# Altium PCB Mainboard.PcbDoc (part 2 of 2)
Units mm, origin at the board's own origin, x right, y up, seen from the top; angles counter-clockwise.
Board outline 100 x 100 mm, 10 copper layers (L1 SIG, L2 GND, L3 SIG HS, L4 SIG HS, L5 VDD, L6 GND, L7 SIG HS, L8 SIG HS, L9 VCC, L10 SIG), stack 1.573 mm thick; 241 components, 320 nets, 1344 pads, 20 vias.
Unrouted connection lines stored in the file: 832.
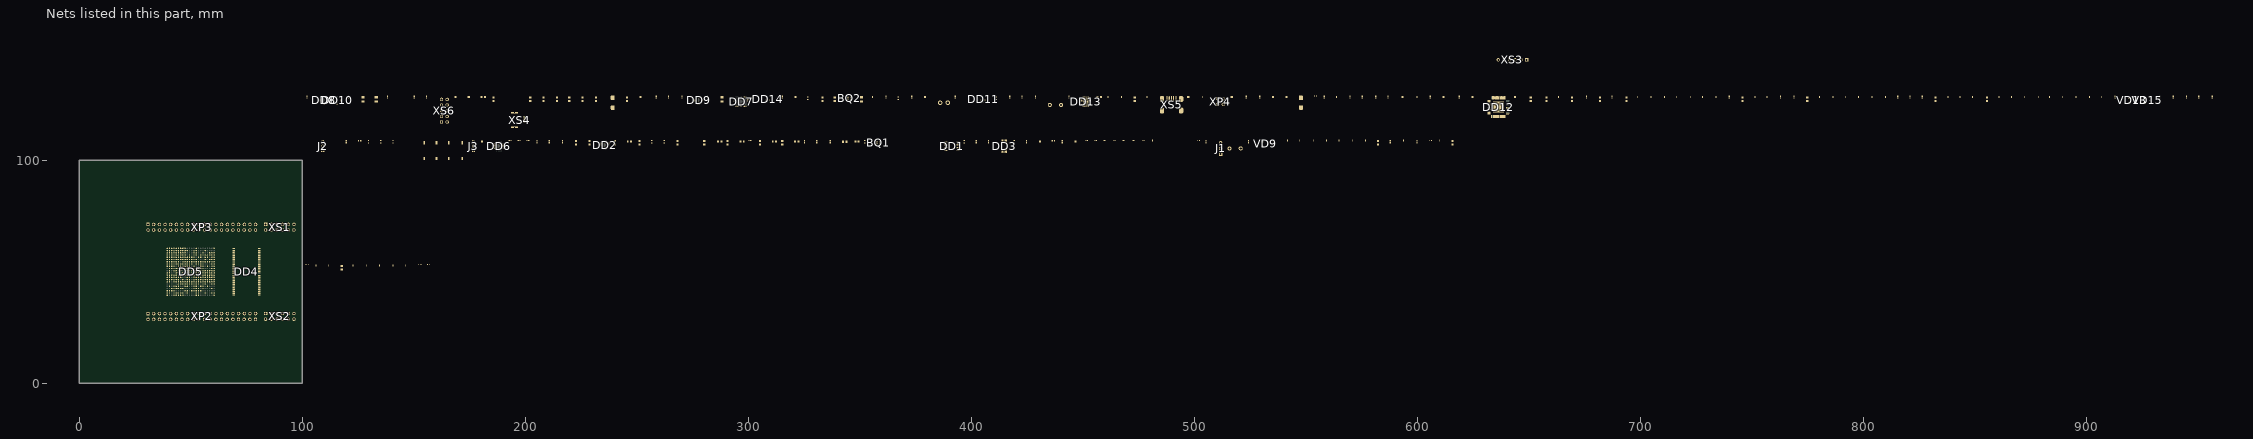
[diagram p2: the nets of this part, all layers, seen from the top]

## Part data
BQ1: "Clock 50 MHZ  main clock for FPGA  3.2x2.5 mm 3.3V 6.5mA", Manufacturer="Silicon Labs", Name=501HAA50M0000CAFR
BQ2: "Clock 24 MHz  secondary clock   3.2x2.5 mm", Manufacturer="Silicon Labs", Name=501HAA24M0000CAFR
C1 C3 C4 C6 C7 C8 C9 C18 C19 C20 C21 C22 C24 C25 C26 C27 C28 C29 C30 C31 C32 C34 C35 C36 C37 C42 C45 C46 C48 C49 C50 C51 C52 C53 C54 C55 C56 C57 C58 C59 C60 C61 C62 C63 C64 C70 C71 C72 C73 C74 C75 C81 C82 C84 C85 C87 C92 C93 C95 C96: library part Cap_0201, "Non-polar Capacitor"
C2 C5 C10 C11 C12 C13 C14 C15 C16 C17 C76 C77 C90: library part Cap_0402, "Non-polar Capacitor"
C23 C33 C38 C39 C41 C43 C44 C47 C66 C67 C78 C79 C80 C83 C86 C88 C89 C91 C94: library part Cap_0603, "Non-polar Capacitor"
C40 C65 C68 C69: library part Cap_0805, "Non-polar Capacitor"
DD1: "16Mb serial flash off-chip processor code storage, etc", Manufacturer=Micron, Name=M25P16-VMN6
DD2: "Accelerometer ADXL362  2.5 or 3.3V 3uA", Manufacturer=ADI, Name="ADXL362BCCZ-RL7 SMD 16 pins"
DD3: "12-bit DAC AD5681R", Manufacturer=ADI, Name=AD5681RBRMZ-RL7
DD4: "SDRAM 8 MB 3.3V 90mA", Manufacturer=ISSI, Name="IS42S16400J-7TL  TSOPII 4 pins"
DD5: "MAX10 10M08DAF484", Manufacturer=ALTERA, Name=10M08DAF484C8GES
DD6: "ADT7420 16-lead LFCSP_WQ", Manufacturer=ADI, Name=ADT7420UCPZ-RL7
DD7: "EN5329QI 24-pin (4 x 6 x 1.1mm) QFN T&R; 3.3", Manufacturer=ALTERA, Name=EN5329QI
DD8 DD9 DD10: "EP53A8LQI 16-pin QFN T&R;  2.5, 1.8, 1.2", Manufacturer=ALTERA, Name=EP53A8LQI
DD11 DD14: "TPD6E001RSER, ESD QFN10-RSE", Manufacturer="Texas Instruments", Name=TPD6E001RSER
DD12: "required for USB Blaster  SQFP7x7-64-EXP", Manufacturer=ALTERA, Name=5M80ZE64C5N
DD13: "FT240XQ FTDI for USB Bluster", Manufacturer=FTDI, Name=FT240XQ-T
J1: "Jumper 2.54mm pitch (default short PIN 1 and 2) 1x3_2.54mm boot select"
J2: "Jumper 2.00mm pitch (default short PIN 1 and 2) 3.3V or 2.5V VCCIO selection 1x3_2.0mm"
J3: "Jumper 2.00mm pitch (default short PIN 1 and 2) 3.3V or 2.5V VCCIO selection  1x3_2.0mm"
L1 L2 L3 L4 L5 L6: library part Inductor, "Inductor  4.7uH/600mA", Manufacturer=Murata, Name=LQM18PN4R7MFR
R1 R2 R3 R4 R13 R14 R15 R16 R17 R18 R19 R20 R21 R22 R23 R24 R25 R26 R28 R29 R30 R31 R32 R33 R34 R35 R36 R37 R38 R39 R40 R41 R42 R43 R46 R47 R48 R49 R50 R51 R52 R53 R54 R55 R56 R57 R58 R59 R60 R61 R62 R63 R64 R68 R69 R70 R71 R72 R73 R74 R75: library part Res_0402, "Resistor"
R5 R6 R7 R8 R9 R10 R11 R12 R65 R66 R67: library part Res_0603, "Resistor"
R27 R44: library part Res_Thermistor, "Resistor"
R45: library part Res_Photoresistor, "CDS Photo Resistor PGM5526  Light sensor", Manufacturer=Token, Name=PGM5526
SB1 SB2 SB3 SB4: "SPST Micro SMD PushButton", Name="Micro SMD PushButton 3.7x6.1x2.5mm 2P"
TP1 TP2 TP3 TP4 TP5 TP6 TP7 TP8 TP9 TP10 TP11 TP12 TP13 TP14 TP15 TP16: "Standard Testing Point"
VD1 VD2 VD3 VD4 VD5 VD6 VD7 VD8 VD11 VD12: "LED GREEN CLEAR 2.3V 30mA 8-bit output, two for status", Manufacturer="Bet Lux Electronics", Name="BL-LS0603GC SMD"
VD9: library part "Diode Adjustable Shunt Regulator (U14)", "SPX432 1.24V SOT-23", Manufacturer="Diodes Incorporated", Name="SPX432 1.24V SOT-23"
VD10 VD14: "DIODE SCHOTTKY B360A 60V 0,5mA SMA", Manufacturer="Diodes Incorporated", Name=B360A
VD13 VD15: "DIODE SCHOTTKY  BAT54C 30V 200mA SOT23", Manufacturer="Fairchild Semiconductor", Name=BAT54C
VD16: "LED RED CLEAR 2.2V 30mA Power led", Manufacturer="Bet Lux Electronics", Name="BL-LS0603HC SMD"
XP2 XP3: "PIN_HEADER_2x20_2.54mm 2x 20 pin headers for expansion and loopback"
XP4: "Jumper Analog input (AIN1 and AIN2)  4 pin 2x2_2.54mm", Name="Jumper Analog input (AIN1 and AIN2)  4 pin 2x2_2.54mm"
XS1 XS2: "PMOD Female 2x6, 2.54 mm, DIP", Manufacturer="TE Connectivity AMP Connectors", Name="PMOD Connectors"
XS3: "PIN_HEADER_1x6_2.54mm(DNI)", Name=PIN_HEADER_1x6_2.54mm(DNI)
XS4: "Power Jack, 4.5mm_1.3mm"
XS5: "USB-Blaster connector", Name="Mini USB connector"
XS6: "PIN_HEADER_2x5_2.54mm(DNI)", Name=PIN_HEADER_2x5_2.54mm(DNI)

## Via types
v1: diameter 0.5, hole 0.2, L1 SIG to L10 SIG, 20 vias

## Nets (pads, with @x,y where several pads share a name; then routed paths per layer and width w, separated by ;. In a path a pad name is that pad's centre, name@x,y a point inside that pad or via, vN(x,y) a via of type N, cw(c..) or ccw(c..) an arc to the next point about the centre after c; other vN are vias at no path point)
AD5681R_LDACn: DD3.4 DD5.N18
AD5681R_RSTn: DD3.3 DD5.L15
AD5681R_SCL: DD3.6 DD5.G17
AD5681R_SDA: DD3.8 DD5.H17
AD5681R_SYNCn: DD3.7 DD5.N19
ADC_IN1: R46.1 R52.1 XP4.1
ADC_IN2: R47.1 R53.1 XP4.2
ADC_IN3: R48.1 R54.1 TP8.1
ADC_IN4: R49.1 R55.1 TP9.1
ADC_IN5: R50.1 R56.1 TP10.1
ADC_IN6: R51.1 R57.1 TP11.1
ADT7420_CT: DD5.P13 DD6.10
ADT7420_INT: DD5.AB14 DD6.9
ADT7420_SCL: DD5.W13 DD6.1 R24.1
ADT7420_SDA: DD5.R13 DD6.2 R25.1
ADXL362_CS: DD2.8 DD5.L14
ADXL362_INT1: DD2.11 DD5.M15
ADXL362_INT2: DD2.9 DD5.M14
ADXL362_MISO: DD2.7 DD5.L18
ADXL362_MOSI: DD2.6 DD5.L19
ADXL362_SCLK: DD2.4 DD5.M18
Analog1: C70.2 DD5.F5 R52.2
Analog2: C71.2 DD5.E4 R53.2
Analog3: C72.2 DD5.F4 R54.2
Analog4: C73.2 DD5.E3 R55.2
Analog5: C74.2 DD5.J8 R56.2
Analog6: C75.2 DD5.G4 R57.2
blaster_D0: DD12.19 DD13.21
blaster_D1: DD12.20 DD13.1
blaster_D2: DD12.21 DD13.23
blaster_D3: DD12.22 DD13.6
blaster_D4: DD12.24 DD13.22
blaster_D5: DD12.25 DD13.4
blaster_D6: DD12.26 DD13.5
blaster_D7: DD12.27 DD13.2
blaster_RD#: DD12.30 DD13.8
blaster_RXF#: DD12.33 DD13.18
blaster_TXE#: DD12.32 DD13.17
blaster_WR: DD12.31 DD13.9
CBUS5: DD12.11 DD12.40 DD13.20 R70.1
CBUS6: DD12.13 DD12.42 DD13.19 R71.1
CLK_24MHZ: BQ2.3 DD5.N15 DD12.7
CPLD_TCK: DD12.16 XS3.2
CPLD_TDI: DD12.15 R63.1 R64.1 XS3.3
CPLD_TDO: DD12.17 R60.2 XS3.1
CPLD_TMS: DD12.14 XS3.4
DIFF_RX_0+: DD5.K14 XP3.39
DIFF_RX_0-: DD5.K15 XP3.40
DIFF_RX_1+: DD5.E16 XP3.37
DIFF_RX_1-: DD5.E15 XP3.38
DIFF_RX_2+: DD5.D17 XP3.35
DIFF_RX_2-: DD5.C17 XP3.36
DIFF_RX_3+: DD5.H14 XP3.33
DIFF_RX_3-: DD5.J13 XP3.34
DIFF_RX_4+: DD5.C14 XP3.31
DIFF_RX_4-: DD5.C13 XP3.32
DIFF_RX_5+: DD5.A14 XP3.27
DIFF_RX_5-: DD5.B14 XP3.28
DIFF_RX_6+: DD5.D14 XP3.25
DIFF_RX_6-: DD5.E13 XP3.26
DIFF_RX_7+: DD5.E12 XP3.23
DIFF_RX_7-: DD5.D13 XP3.24
DIFF_RX_8+: DD5.H12 XP3.21
DIFF_RX_8-: DD5.J11 XP3.22
DIFF_RX_9+: DD5.B10 XP3.19
DIFF_RX_9-: DD5.C9 XP3.20
DIFF_RX_A+: DD5.A9 XP3.17
DIFF_RX_A-: DD5.B8 XP3.18
DIFF_RX_B+: DD5.A7 XP3.15
DIFF_RX_B-: DD5.A8 XP3.16
EG_P1: DD5.C1
EG_P2: DD5.D2
EG_P3: DD5.D1
EG_P4: DD5.D3
EG_P5: DD5.E1
EG_P6: DD5.F2
EG_P7: DD5.F1
EG_P8: DD5.G1
EG_P9: DD5.H1
EG_P10: DD5.J1
EG_P11: DD5.K2
EG_P12: DD5.L2
EG_P13: DD5.N2
EG_P14: DD5.P3
EG_P15: DD5.P1
EG_P16: DD5.R3
EG_P17: DD5.T2
EG_P18: DD5.R4
EG_P19: DD5.T5
EG_P20: DD5.Y1
EG_P21: DD5.Y2
EG_P22: DD5.AA1
EG_P23: DD5.AA2
EG_P24: DD5.Y3
EG_P25: DD5.Y4
EG_P26: DD5.AB6
EG_P27: DD5.AB7
EG_P28: DD5.AA8
EG_P29: DD5.AB8
EG_P35: DD5.E11
EG_P36: DD5.E10
EG_P37: DD5.D9
EG_P38: DD5.E9
EG_P39: DD5.E8
EG_P40: DD5.D8
EG_P41: DD5.E6
EG_P42: DD5.D7
EG_P43: DD5.C8
EG_P44: DD5.C7
EG_P45: DD5.D6
EG_P46: DD5.C6
EG_P47: DD5.D5
EG_P48: DD5.C5
EG_P49: DD5.C4
EG_P50: DD5.H11
EG_P51: DD5.J10
EG_P52: DD5.M9
EG_P53: DD5.M8
EG_P54: DD5.N9
EG_P55: DD5.N8
EG_P56: DD5.N5
EG_P57: DD5.N4
EG_P58: DD5.N3
EG_P59: DD5.P5
EG_P60: DD5.P4
EXP_PRESENT: DD5.R5 R15.2
F_ASDI: DD1.5 DD5.R11
F_CSn: DD1.1 DD5.R10
F_DATA: DD1.2 DD5.P10
F_DCLK: DD1.6 DD5.P11
FPGA_CLK_50MHZ: BQ1.3 DD5.N14
FPGA_TCK: R41.1 R43.1 R69.1
FPGA_TDI: DD5.L4 DD12.1 R36.1
FPGA_TDO: DD5.M5 DD12.3
FPGA_TMS: DD5.H2 DD12.2 R35.1
FT240_RST#: DD12.12 DD13.13 R73.2
GND: BQ1.2 BQ2.2 C1.1 C2.1 C3.1 C4.1 C5.2 C6.1 C7.1 C8.1 C9.1 C10.2 C11.1 C12.1 C13.1 C14.1 C15.1 C16.2 C17.2 C18.1 C19.1 C20.1 C21.1 C22.1 C23.1 C24.1 C25.1 C26.1 C27.1 C28.1 C29.1 C30.1 C31.1 C32.1 C33.1 C34.1 C35.1 C36.1 C37.1 C38.1 C39.1 C40.1 C41.1 C42.1 C43.1 C44.1 C45.1 C46.1 C47.1 C48.1 C49.1 C50.1 C51.1 C52.1 C53.1 C54.1 C55.1 C56.1 C57.1 C58.1 C59.1 C60.1 C61.1 C62.1 C63.1 C65.1 C66.1 C67.1 C68.1 C69.1 C70.1 C71.1 C72.1 C73.1 C74.1 C75.1 C76.1 C77.1 C78.1 C79.1 C80.1 C81.1 C82.1 C83.1 C84.1 C85.1 C86.1 C87.1 C88.1 C89.1 C90.1 C91.1 C92.1 C93.1 C94.1 C95.1 C96.1 DD1.4 DD2.12 DD2.13 DD2.16 DD3.5 DD4.6 DD4.12 DD4.28 DD4.41 DD4.46 DD4.52 DD4.54 DD5.A1 DD5.A22 DD5.AA4 DD5.AA18 DD5.AB1 DD5.AB22 DD5.B6 DD5.B9 DD5.B13 DD5.B18 DD5.D4 DD5.D11 DD5.D16 DD5.D20 DD5.E2 DD5.E5 DD5.E7 DD5.F6 DD5.F10 DD5.F13 DD5.G5 DD5.G6 DD5.G8 DD5.G15 DD5.G18 DD5.G21 DD5.H5 DD5.J2 DD5.J3 DD5.J6 DD5.J16 DD5.J19 DD5.K3 DD5.K4 DD5.K5 DD5.K6 DD5.K10 DD5.K12 DD5.L5 DD5.L13 DD5.L17 DD5.L21 DD5.M7 DD5.M10 DD5.M16 DD5.M19 DD5.N11 DD5.N13 DD5.P2 DD5.P6 DD5.P17 DD5.R19 DD5.R21 DD5.T4 DD5.T8 DD5.T14 DD5.T16 DD5.U10 DD5.U13 DD5.V2 DD5.V6 DD5.V19 DD5.W21 DD5.Y9 DD5.Y12 DD5.Y15 DD6.3 DD6.4 DD6.11 DD7.2 DD7.3 DD7.8 DD7.9 DD7.15 DD8.2 DD8.3 DD8.6 DD8.9 DD8.11 DD9.2 DD9.3 DD9.6 DD10.2 DD10.3 DD10.6 DD11.8 DD12.28 DD12.29 DD12.65 DD13.3 DD13.7 DD13.16 DD13.25 DD14.5 R15.1 R16.2 R21.1 R27.1 R32.1 R38.1 R40.1 R43.2 R46.2 R47.2 R48.2 R49.2 R50.2 R51.2 R58.1 R59.1 R60.1 R68.1 R74.1 SB1.1 SB2.1 SB3.1 SB4.1 TP12.1 VD9.3 VD16.2 XP2.7 XP2.8 XP2.9 XP2.10 XP2.17 XP2.18 XP2.25 XP2.26 XP2.33 XP2.34 XP3.12 XP3.30 XP4.3 XP4.4 XS1.9 XS1.10 XS2.9 XS2.10 XS3.6 XS4.2 XS4.3 XS5.5 XS5.6 XS5.7 XS5.8 XS5.9 XS6.2 XS6.10
  other v1: 450.649,125.75 451.749,125.75 450.649,126.85 451.749,126.85
GPIO_01: DD5.B2 XP3.1
GPIO_02: DD5.B1 XP3.2
GPIO_03: DD5.C3 XP3.3
GPIO_04: DD5.A2 XP3.4
GPIO_05: DD5.B3 XP3.5
GPIO_06: DD5.A3 XP3.6
GPIO_07: DD5.B4 XP3.7
GPIO_08: DD5.A4 XP3.8
GPIO_09: DD5.B5 XP3.9
GPIO_10: DD5.A5 XP3.10
GPIO_11: DD5.B7 XP3.13
GPIO_12: DD5.A6 XP3.14
GPIO_A: DD5.AA15 XP2.5
GPIO_B: DD5.Y16 XP2.6
I2C_SCL: DD5.AB15 R23.1 XP2.4
I2C_SDA: DD5.AA14 R22.1 XP2.3
LVDS_TX_0+: DD5.V17 XP2.40
LVDS_TX_0-: DD5.W17 XP2.39
LVDS_TX_1+: DD5.V16 XP2.38
LVDS_TX_1-: DD5.U15 XP2.37
LVDS_TX_2+: DD5.W15 XP2.36
LVDS_TX_2-: DD5.V14 XP2.35
LVDS_TX_3+: DD5.W14 XP2.32
LVDS_TX_3-: DD5.V13 XP2.31
LVDS_TX_4+: DD5.Y14 XP2.30
LVDS_TX_4-: DD5.Y13 XP2.29
LVDS_TX_5+: DD5.AA10 XP2.28
LVDS_TX_5-: DD5.Y10 XP2.27
LVDS_TX_6+: DD5.V10 XP2.24
LVDS_TX_6-: DD5.V9 XP2.23
LVDS_TX_7+: DD5.AA7 XP2.22
LVDS_TX_7-: DD5.AA6 XP2.21
LVDS_TX_8+: DD5.W8 XP2.20
LVDS_TX_8-: DD5.W7 XP2.19
LVDS_TX_9+: DD5.U7 XP2.16
LVDS_TX_9-: DD5.U6 XP2.15
LVDS_TX_A+: DD5.W6 XP2.14
LVDS_TX_A-: DD5.W5 XP2.13
LVDS_TX_B+: DD5.W3 XP2.12
LVDS_TX_B-: DD5.W4 XP2.11
NetC12_2: C12.2 C15.2 DD2.14 R3.1
NetC13_2: C13.2 DD3.9 TP2.1
NetC26_2: C26.2 DD5.G16 DD5.T7 L1.1
NetC28_2: C28.2 C30.2 C32.2 C34.2 DD5.H8 DD5.H15 DD5.R8 DD5.T15 L2.1
NetC35_2: C35.2 DD5.H6 L3.1
NetC36_2: C36.2 DD5.J7 L4.1
NetC37_2: C37.2 C38.2 DD5.H7 L5.1
NetC64_1: C64.1 DD7.14 R31.1 R32.2
NetC80_2: C80.2 C83.2 C86.2 C88.2 C89.2 R67.1 VD10.1
NetC96_2: C96.2 DD13.12
NetDD3_10: DD3.10 TP1.1
NetDD5_F7: DD5.F7 R16.1
NetDD5_F8: DD5.F8 R18.1
NetDD5_F9: DD5.F9 DD5.F11 DD5.F12 DD5.F14 DD5.G10 DD5.G11 DD5.G12 DD5.G13 DD5.G14
NetDD5_G2: DD5.G2 R41.2
NetDD5_G9: DD5.G9 R17.1
NetDD5_H9: DD5.H9 R19.1
NetDD5_H10: DD5.H10 J1.2
NetDD5_K9: DD5.K9 R42.1
NetDD7_17: DD7.17 R29.2
NetDD8_10: DD8.10 DD8.12 DD8.13 R30.2
NetDD9_4: DD9.4 R37.2 R38.2
NetDD9_9: DD9.9 DD9.10 DD9.11 DD9.12 DD9.13 R33.2
NetDD10_4: DD10.4 R39.2 R40.2
NetDD10_9: DD10.9 DD10.10 DD10.11 DD10.12 DD10.13 R34.2
NetDD11_1: DD11.1 DD13.11 XS5.2
NetDD11_2: DD11.2 DD13.10 XS5.3
NetDD12_4: DD12.4 R69.2
NetDD12_39: DD12.39 DD12.57 VD13.1 VD15.1
NetDD12_49: DD12.49 VD11.2
NetDD12_50: DD12.50 VD12.2
NetDD13_15: DD13.15 L6.2 R73.1
NetJ1_1: J1.1 R20.1
NetJ1_3: J1.3 R21.2
NetR5_1: R5.1 VD1.1
NetR6_1: R6.1 VD2.1
NetR7_1: R7.1 VD3.1
NetR8_1: R8.1 VD4.1
NetR9_1: R9.1 VD5.1
NetR10_1: R10.1 VD6.1
NetR11_1: R11.1 VD7.1
NetR12_1: R12.1 VD8.1
NetR26_1: R26.1 R27.2 VD9.1
NetR44_2: R44.2 R58.2 R61.2
NetR45_2: R45.2 R59.2 R62.2
NetR65_1: R65.1 VD11.1
NetR66_1: R66.1 VD12.1
NetR67_2: R67.2 VD16.1
NetR68_2: R68.2 XS5.4
NetVD10_2: VD10.2 XS4.1
PB1: C5.1 DD5.M1 R1.1 SB1.2
PB2: C10.1 DD5.R1 R2.1 SB2.2
PB3: C16.1 DD5.V5 R4.1 SB3.2
PB4: C17.1 DD5.AB5 R13.1 SB4.2
photo: C77.2 DD5.J9 R62.1
PMOD_A_1: DD5.C20 XS1.1
PMOD_A_2: DD5.D19 XS1.3
PMOD_A_3: DD5.D18 XS1.5
PMOD_A_4: DD5.E18 XS1.7
PMOD_B_1: DD5.E19 XS1.2
PMOD_B_2: DD5.F18 XS1.4
PMOD_B_3: DD5.F20 XS1.6
PMOD_B_4: DD5.G19 XS1.8
PMOD_C_1: DD5.U18 XS2.1
PMOD_C_2: DD5.U17 XS2.3
PMOD_C_3: DD5.R18 XS2.5
PMOD_C_4: DD5.P18 XS2.7
PMOD_D_1: DD5.R14 XS2.2
PMOD_D_2: DD5.R15 XS2.4
PMOD_D_3: DD5.P15 XS2.6
PMOD_D_4: DD5.P14 XS2.8
RESET_EXP#: DD5.C2 R14.2
SDRAM_A0: DD4.23 DD5.T20
SDRAM_A1: DD4.24 DD5.T19
SDRAM_A2: DD4.25 DD5.T18
SDRAM_A3: DD4.26 DD5.AA21
SDRAM_A4: DD4.29 DD5.AA22
SDRAM_A5: DD4.30 DD5.U22
SDRAM_A6: DD4.31 DD5.T22
SDRAM_A7: DD4.32 DD5.R22
SDRAM_A8: DD4.33 DD5.P20
SDRAM_A9: DD4.34 DD5.P22
SDRAM_A10: DD4.22 DD5.U21
SDRAM_A11: DD4.35 DD5.P19
SDRAM_A12: DD4.36 DD5.N20
SDRAM_BA0: DD4.20 DD5.R20
SDRAM_BA1: DD4.21 DD5.T21
SDRAM_CASn: DD4.17 DD5.N21
SDRAM_CKE: DD4.37 DD5.N22
SDRAM_CLK: DD4.38 DD5.M22
SDRAM_CSn: DD4.19 DD5.P21
SDRAM_DQ0: DD4.2 DD5.C22
SDRAM_DQ1: DD4.4 DD5.D22
SDRAM_DQ2: DD4.5 DD5.E22
SDRAM_DQ3: DD4.7 DD5.F22
SDRAM_DQ4: DD4.8 DD5.G22
SDRAM_DQ5: DD4.10 DD5.H22
SDRAM_DQ6: DD4.11 DD5.J22
SDRAM_DQ7: DD4.13 DD5.K22
SDRAM_DQ8: DD4.42 DD5.K21
SDRAM_DQ9: DD4.44 DD5.J21
SDRAM_DQ10: DD4.45 DD5.H21
SDRAM_DQ11: DD4.47 DD5.G20
SDRAM_DQ12: DD4.48 DD5.F21
SDRAM_DQ13: DD4.50 DD5.E21
SDRAM_DQ14: DD4.51 DD5.D21
SDRAM_DQ15: DD4.53 DD5.C21
SDRAM_DQMH: DD4.39 DD5.L22
SDRAM_DQML: DD4.15 DD5.L20
SDRAM_RASn: DD4.18 DD5.M20
SDRAM_WEn: DD4.16 DD5.M21
thermal: C76.2 DD5.F3 R61.1
USB_ASDO: DD12.54 DD14.6 XS6.7
USB_Blaster_HP: DD11.6 DD12.59 R74.2 R75.1
USB_Blaster_Power: R75.2 VD15.2 XS6.4
USB_NCE: DD11.7 DD12.56 XS6.6
USB_NCS: DD12.58 DD14.8 XS6.8
USB_TCK: DD12.51 DD14.1 XS6.1
USB_TDI: DD12.55 DD14.7 XS6.9
USB_TDO: DD12.52 DD14.2 XS6.3
USB_TEST0: DD12.60 TP13.1
USB_TEST1: DD12.61 TP14.1
USB_TEST2: DD12.62 TP15.1
USB_TEST3: DD12.63 TP16.1
USB_TMS: DD12.53 DD14.3 XS6.5
USB_VCCIO: DD13.24 R70.2 R71.2 R72.2
USER_LED1: DD5.M2 VD1.2
USER_LED2: DD5.N1 VD2.2
USER_LED3: DD5.R2 VD3.2
USER_LED4: DD5.T1 VD4.2
USER_LED5: DD5.V4 VD5.2
USER_LED6: DD5.T6 VD6.2
USER_LED7: DD5.AB4 VD7.2
USER_LED8: DD5.AA5 VD8.2
VCC1P2: C18.2 C20.2 C22.2 C24.2 C25.2 C27.2 C29.2 C31.2 C33.2 C65.2 DD5.G3 DD5.H3 DD5.K11 DD5.K13 DD5.L10 DD5.L11 DD5.L12 DD5.M11 DD5.M12 DD5.M13 DD5.N10 DD5.N12 DD8.5 DD8.7 DD8.8 L1.2 L4.2 L5.2 TP4.1
VCC1P8: C68.2 C79.2 C82.2 C85.2 DD9.5 DD9.7 DD9.8 DD12.8 DD12.41 R37.1 TP6.1 VD13.2
VCC2P5: C69.2 DD5.H4 DD10.5 DD10.7 DD10.8 J2.3 J3.3 L2.2 R5.2 R6.2 R7.2 R8.2 R9.2 R10.2 R11.2 R12.2 R39.1 TP7.1
VCC3P3: BQ1.1 BQ1.4 BQ2.1 BQ2.4 C1.2 C2.2 C3.2 C4.2 C6.2 C7.2 C8.2 C9.2 C11.2 C14.2 C19.2 C21.2 C23.2 C64.2 C90.2 DD1.3 DD1.7 DD1.8 DD3.1 DD3.2 DD4.1 DD4.3 DD4.9 DD4.14 DD4.27 DD4.43 DD4.49 DD5.J4 DD5.K7 DD5.L6 DD5.L7 DD5.M6 DD6.12 DD7.4 DD7.5 DD7.6 DD7.7 DD11.10 DD14.10 J2.1 J3.1 R1.2 R2.2 R4.2 R13.2 R14.1 R22.2 R23.2 R24.2 R25.2 R28.1 R31.2 R35.2 R36.2 R42.2 R44.1 R45.1 R65.2 R66.2 TP5.1 XP2.1 XP2.2 XP3.29 XS1.11 XS1.12 XS2.11 XS2.12
VCC5P0: C40.2 C41.2 C44.2 C66.2 C67.2 C91.2 C92.2 C93.2 C94.2 C95.2 DD7.10 DD7.11 DD7.12 DD7.16 DD7.18 DD7.19 DD7.20 DD8.14 DD9.14 DD10.14 L6.1 R29.1 R30.1 R33.1 R34.1 VD14.1 XP3.11
VCC_USB_5P0: VD14.2 XS5.1
VCCIO_power: C39.2 C42.2 C43.2 C45.2 C46.2 C48.2 C49.2 C51.2 C52.2 C54.2 C55.2 C57.2 C58.2 C60.2 C62.2 C78.2 C81.2 C84.2 C87.2 DD5.N6 DD5.N7 DD5.P7 DD5.R6 DD5.T9 DD5.T10 DD5.T11 DD5.T12 DD5.T13 DD5.U8 DD5.U9 DD5.U11 DD5.U12 DD5.U14 DD12.6 DD12.23 J3.2 R17.2 R18.2 R19.2 R20.2 R63.2 R64.2 R72.1 TP3.1 XS3.5
VCCIO_sdram: C47.2 C50.2 C53.2 C56.2 C59.2 C61.2 C63.2 DD2.1 DD5.H16 DD5.J17 DD5.K16 DD5.K17 DD5.L16 DD5.M17 DD5.N16 DD5.N17 DD5.P16 DD5.R16 DD5.R17 DD5.T17 J2.2 R3.2
Vz: L3.2 R26.2 R28.2 VD9.2
pads on no net: DD2.2 DD2.3 DD2.5 DD2.10 DD2.15 DD2.17 DD4.40 DD5.A10 DD5.A11 DD5.A12 DD5.A13 DD5.A15 DD5.A16 DD5.A17 DD5.A18 DD5.A19 DD5.A20 DD5.A21 DD5.AA3 DD5.AA9 DD5.AA11 DD5.AA12 DD5.AA13 DD5.AA16 DD5.AA17 DD5.AA19 DD5.AA20 DD5.AB2 DD5.AB3 DD5.AB9 DD5.AB10 DD5.AB11 DD5.AB12 DD5.AB13 DD5.AB16 DD5.AB17 DD5.AB18 DD5.AB19 DD5.AB20 DD5.AB21 DD5.B11 DD5.B12 DD5.B15 DD5.B16 DD5.B17 DD5.B19 DD5.B20 DD5.B21 DD5.B22 DD5.C10 DD5.C11 DD5.C12 DD5.C15 DD5.C16 DD5.C18 DD5.C19 DD5.D10 DD5.D12 DD5.D15 DD5.E14 DD5.E17 DD5.E20 DD5.F15 DD5.F16 DD5.F17 DD5.F19 DD5.G7 DD5.H13 DD5.H18 DD5.H19 DD5.H20 DD5.J5 DD5.J12 DD5.J14 DD5.J15 DD5.J18 DD5.J20 DD5.K1 DD5.K8 DD5.K18 DD5.K19 DD5.K20 DD5.L1 DD5.L3 DD5.L8 DD5.L9 DD5.M3 DD5.M4 DD5.P8 DD5.P9 DD5.P12 DD5.R7 DD5.R9 DD5.R12 DD5.T3 DD5.U1 DD5.U2 DD5.U3 DD5.U4 DD5.U5 DD5.U16 DD5.U19 DD5.U20 DD5.V1 DD5.V3 DD5.V7 DD5.V8 DD5.V11 DD5.V12 DD5.V15 DD5.V18 DD5.V20 DD5.V21 DD5.V22 DD5.W1 DD5.W2 DD5.W9 DD5.W10 DD5.W11 DD5.W12 DD5.W16 DD5.W18 DD5.W19 DD5.W20 DD5.W22 DD5.Y5 DD5.Y6 DD5.Y7 DD5.Y8 DD5.Y11 DD5.Y17 DD5.Y18 DD5.Y19 DD5.Y20 DD5.Y21 DD5.Y22 DD6.5 DD6.6 DD6.7 DD6.8 DD6.13 DD6.14 DD6.15 DD6.16 DD6.17 DD7.1 DD7.13 DD7.21 DD7.22 DD7.23 DD7.24 DD7.25 DD8.1 DD8.4 DD8.15 DD8.16 DD8.17 DD9.1 DD9.15 DD9.16 DD9.17 DD10.1 DD10.15 DD10.16 DD10.17 DD11.3 DD11.4 DD11.5 DD11.9 DD11.11 DD12.5 DD12.9 DD12.10 DD12.18 DD12.34 DD12.35 DD12.36 DD12.37 DD12.38 DD12.43 DD12.44 DD12.45 DD12.46 DD12.47 DD12.48 DD12.64 DD13.14 DD14.4 DD14.9 DD14.11 VD13.3 VD15.3
copper on no net:
  other v1: 187.65,105.75 188.75,105.75 187.65,106.85 188.75,106.85 295.049,125.2 296.149,125.2 297.249,125.2 298.349,125.2 295.049,126.3 296.149,126.3 297.249,126.3 298.349,126.3 295.049,127.4 296.149,127.4 297.249,127.4 298.349,127.4

## Keep-outs
Keep-Out Layer:
  the board outline again, w0.01